# Altium PCB bt-debug-v1.PcbDoc
Units mm, origin at the board's own origin, x right, y up, seen from the top; angles counter-clockwise.
Board outline 64 x 55 mm, 2 copper layers (Top Layer, Bottom Layer), stack 1.571 mm thick; 52 components, 61 nets, 528 pads, 90 vias.
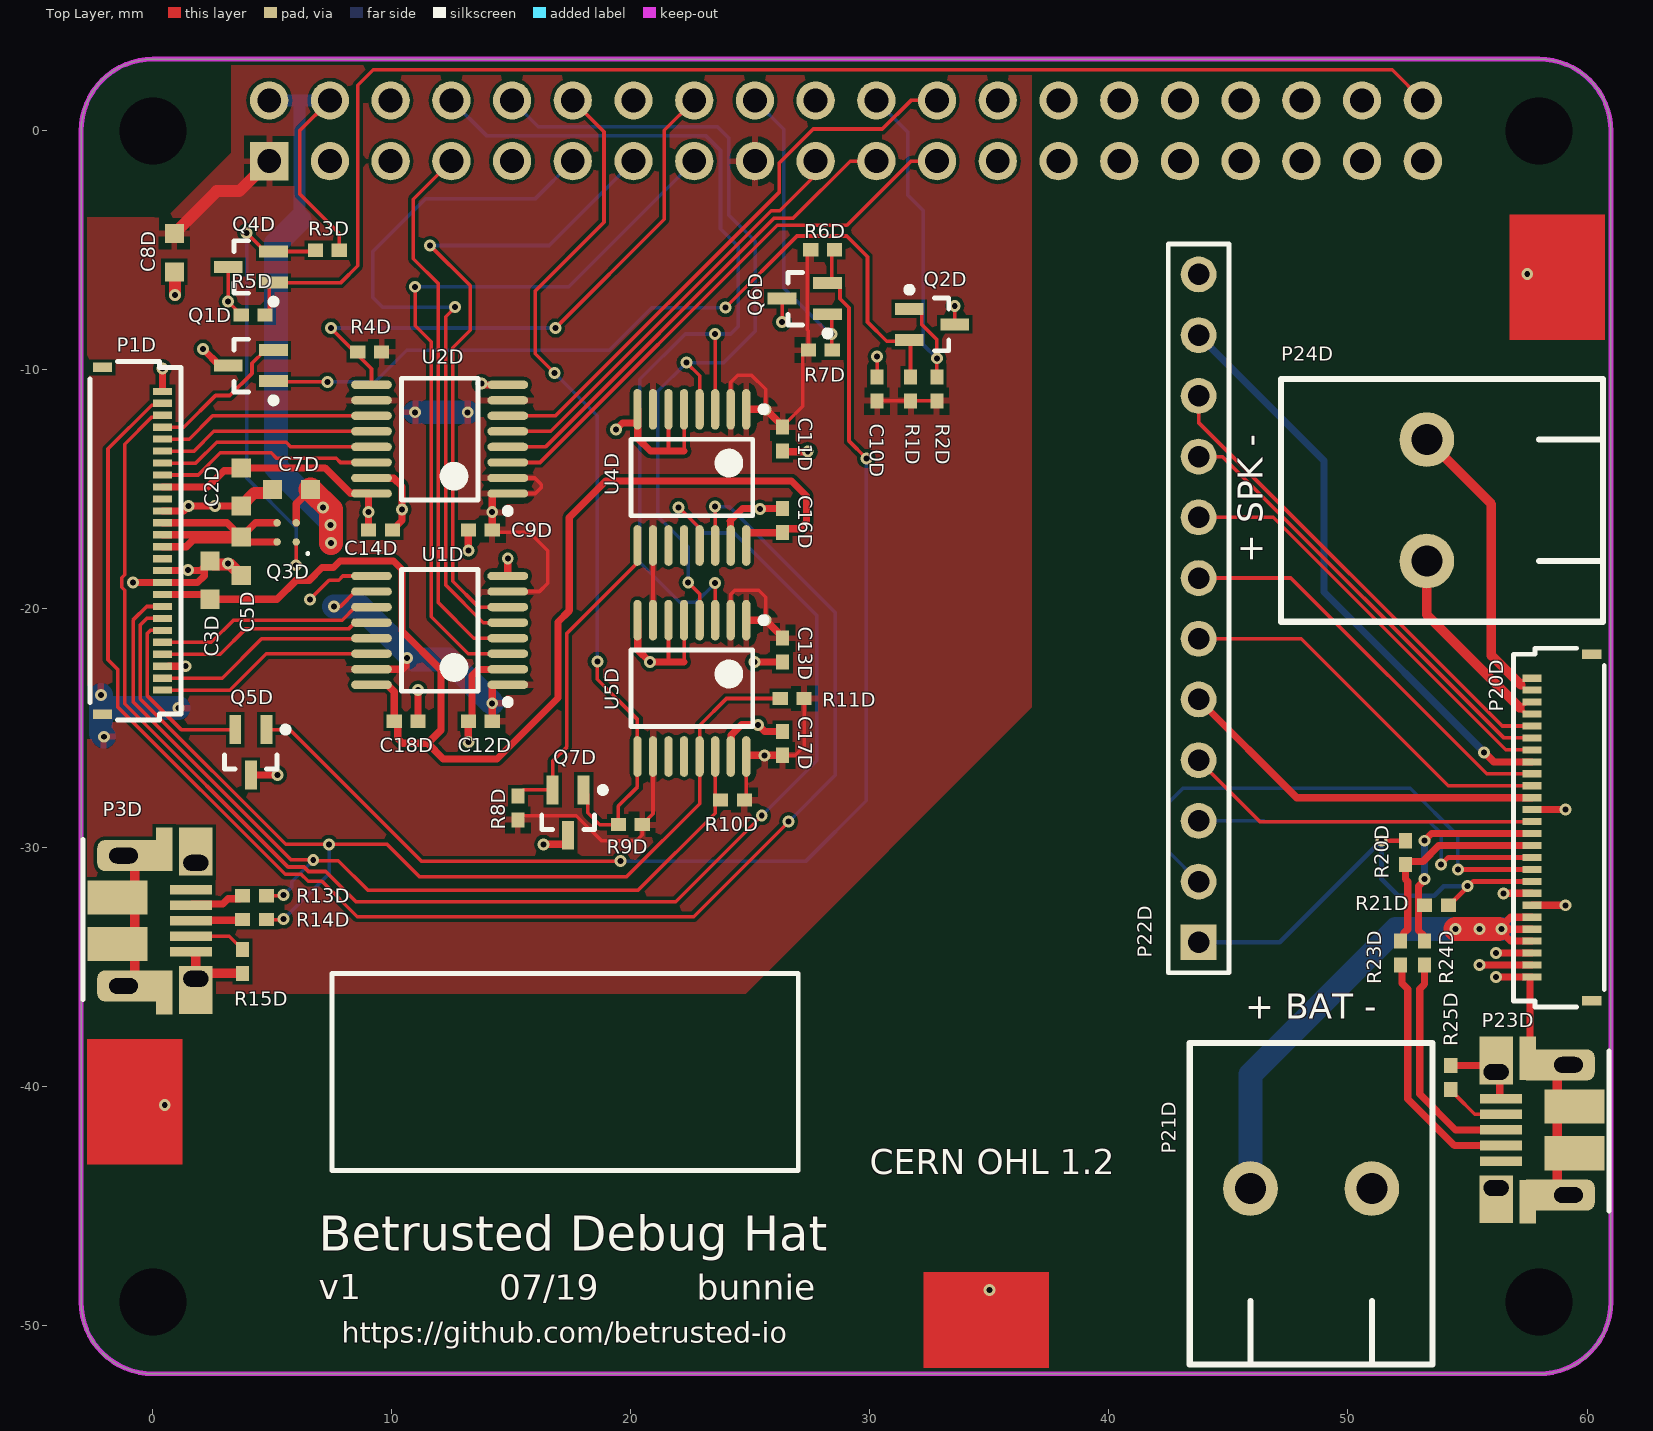
[diagram p0: Top Layer view]
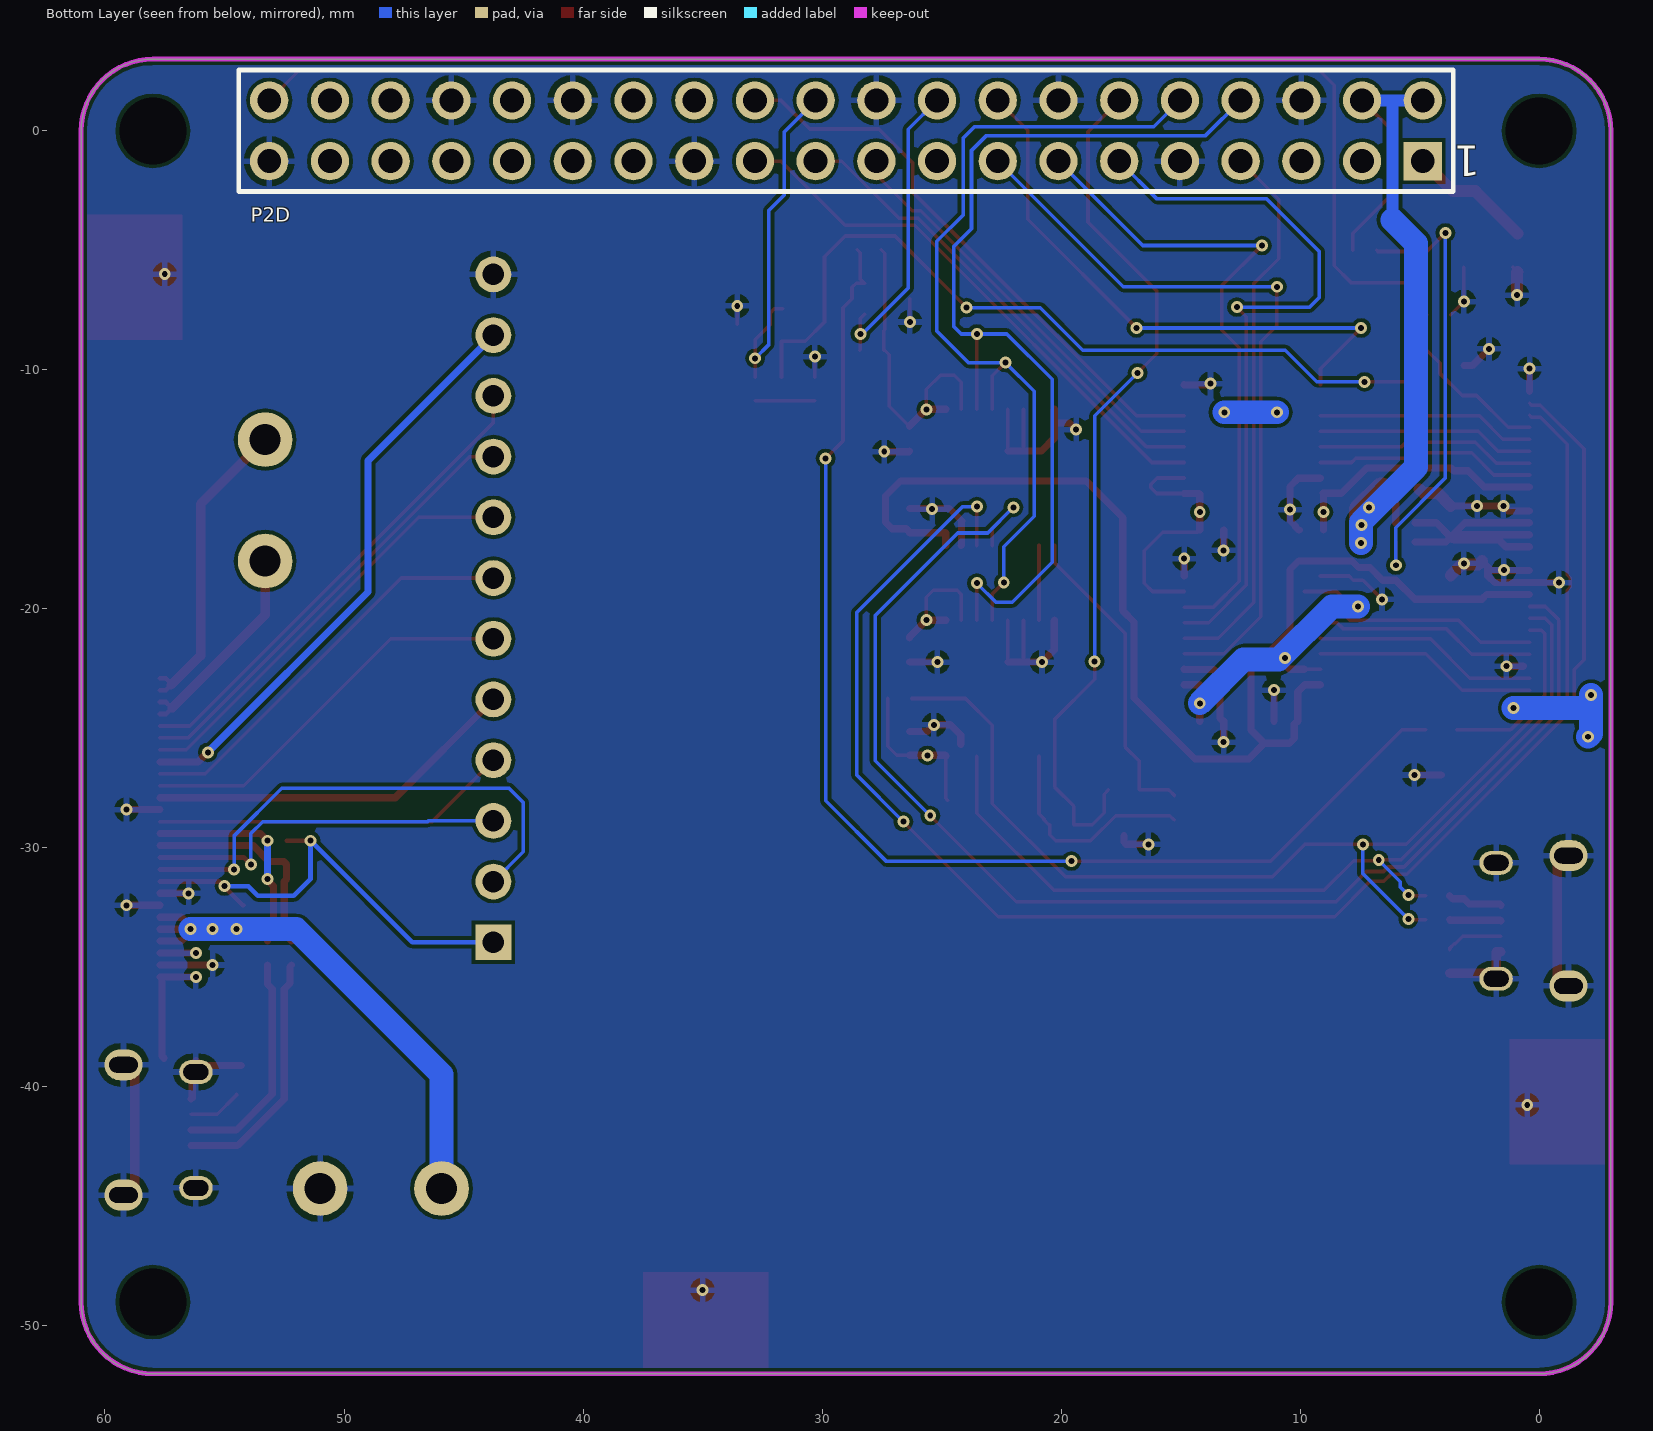
[diagram p1: Bottom Layer view, seen from below]

## Layer stack, top to bottom
Top Solder (Pantone 636U): solder mask 0.0102, Solder Resist, Dk 3.5
Top Layer: signal copper 0.0356
Dielectric 2: prepreg 1.5, FR-4, Dk 4.2
Bottom Layer: signal copper 0.0356
Bottom Solder (Pantone 636U): solder mask 0.0102, Solder Resist, Dk 3.5

## Board outline
-3,-49 -3,0 cw(c0,0) 0,3 58,3 cw(c58,0) 61,0 61,-49 cw(c58,-49) 58,-52 0,-52 cw(c0,-49)

## Design rules (kind name [scope] priority, off if disabled: settings)
Clearance [All] p1: gap=0.15 ignorepadtopadclearanceinfootprint=FALSE
DiffPairsRouting [All] p1: maxlimit=0.127 minlimit=0.127 mostfreqgap=0.127 toplayer_minwidth=0.3 toplayer_maxwidth=0.534 toplayer_prefwidth=0.534 bottomlayer_minwidth=0.3 bottomlayer_maxwidth=0.534 bottomlayer_prefwidth=0.534 impedanceprofiledriven=TRUE impedanceprofileid={78217CE3-51FE-490B-95B5-2C22C78E4475} impedanceprofilevalue=90.000000 maxuncoupledlength=12.7
HoleSize [All] p1: absolutevalues=TRUE maxlimit=4 minlimit=0.025 maxpercent=80.000 minpercent=20.000
MinimumSolderMaskSliver [All] p1 off: minsoldermaskwidth=0.254
PolygonConnect [All] p1: connectstyle=Relief reliefconductorwidth=0.254 reliefentries=4 polygonreliefangle="90 Angle" airgapwidth=0.254
RoomDefinition breakout [InComponentClass('breakout')] p1 off: confinementstyle=ConfineIn formatcopy=TRUE lockcomponents=FALSE outline 62,-50.25 64.5,-50.25 64.5,-16.5 62,-16.5
RoomDefinition debug [InComponentClass('debug')] p2 off: confinementstyle=ConfineIn formatcopy=TRUE lockcomponents=FALSE outline 73.943,-50.777 75.467,-50.777 75.467,-38.331 73.943,-38.331
RoutingVias [All] p1: holewidth=0.25 width=0.5 viastyle="Through Hole" minholewidth=0.25 minwidth=0.5 maxholewidth=0.25 maxwidth=0.5
SilkToSilkClearance [All] p1 off: silktosilkclearance=0.254
SilkToSolderMaskClearance [IsPad] p1 off: minsilkscreentomaskgap=0.254 clearancetoexposedcopper=TRUE
SolderMaskExpansion [All] p1: expansion=0.102
Width [All] p1: maxlimit=3 minlimit=0.15 preferedwidth=0.15
25 further rules are at their usual default settings.

## Classes and differential pairs
component class breakout: P20D P21D P22D P23D P24D R20D R21D R23D R24D R25D
component class debug: C2D C3D C5D C7D C8D C9D C10D C11D C12D C13D C14D C16D C17D C18D NT1D P1D P2D P3D Q1D Q2D Q3D Q4D Q5D Q6D Q7D R1D R2D R3D R4D R5D R6D R7D R8D R9D R10D R11D R13D R14D R15D U1D U2D U4D U5D
differential pair USBD: +USBD_P -USBD_N
differential pair FUSBD: +FUSBD_P -FUSBD_N

## Components (designator, comment, footprint, x,y, rotation, side; value= is the part's Value field where it differs from the comment)
C2D "10uF, 6.3V, X5R" B_CAP0603 3.7,-14.9 r270 top
C3D "10uF, 6.3V, X5R" B_CAP0603 2.4,-18.8 r90 top
C5D "10uF, 6.3V, X5R" B_CAP0603 3.7,-17.8 r270 top
C7D "10uF, 6.3V, X5R" B_CAP0603 5.8,-15 r180 top
C8D "10uF, 6.3V, X5R" B_CAP0603 0.9,-5.1 r270 top
C9D "0.1uF, 10V, X5R" B_CAP0402 13.7,-16.7 r180 top
C10D "0.1uF, 10V, X5R" B_CAP0402 30.3,-10.8 r90 top
C11D "0.1uF, 10V, X5R" B_CAP0402 26.35,-12.9 r270 top
C12D "0.1uF, 10V, X5R" B_CAP0402 13.7,-24.7 r180 top
C13D "0.1uF, 10V, X5R" B_CAP0402 26.35,-21.725 r270 top
C14D "0.1uF, 10V, X5R" B_CAP0402 9.525,-16.7 r0 top
C16D "0.1uF, 10V, X5R" B_CAP0402 26.35,-16.3 r90 top
C17D "0.1uF, 10V, X5R" B_CAP0402 26.35,-25.625 r90 top
C18D "0.1uF, 10V, X5R" B_CAP0402 10.6,-24.7 r0 top
P1D "26-pin FPC" HRS_FH34SRJ-26S-0.5SH(50) 0.4,-17.15 r270 top
P2D "Header 20X2" SAMTEC_SSW-120-01-F-D 4.87,1.27 r0 bottom
P3D "FCI 10103594" USB_MICRO_B_SMT -1.225,-33.05 r270 top
P20D "26-pin FPC" HRS_FH34SRJ-26S-0.5SH(50) 57.7,-29.15 r90 top
P21D "1716060000" weidmuller_1716060000 45.92,-44.25 r0 top
P22D "Header 12" HDR1X12 43.75,-33.95 r90 top
P23D "FCI 10103594" USB_MICRO_B_SMT 59.225,-41.8 r90 top
P24D "1716060000" weidmuller_1716060000 53.3,-18 r90 top
Q1D "DMG1012UW-7" SOT323-3AN 4.1,-9.825 r180 top
Q2D "DMG1012UW-7" SOT323-3AN 32.6,-8.1 r0 top
Q3D "Si8425DB" VISHAY_MICRO_FOOT_4_BUMP 5.6,-16.8 r180 top
Q4D "DMG1012UW-7" SOT323-3AN 4.1,-5.7 r180 top
Q5D "DMG1012UW-7" SOT323-3AN 4.1,-26 r270 top
Q6D "DMG1012UW-7" SOT323-3AN 27.275,-7.025 r180 top
Q7D "DMG1012UW-7" SOT323-3AN 17.375,-28.525 r270 top
R1D "4.7k, 1%" B_RES0402 31.7,-10.8 r270 top
R2D "4.7k, 1%" B_RES0402 32.8,-10.8 r270 top
R3D "4.7k, 1%" B_RES0402 7.3,-5 r180 top
R4D "4.7k, 1%" B_RES0402 9.075,-9.25 r0 top
R5D "4.7k, 1%" B_RES0402 4.2,-7.7 r0 top
R6D "4.7k, 1%" B_RES0402 28.025,-4.975 r180 top
R7D "4.7k, 1%" B_RES0402 27.925,-9.175 r180 top
R8D "4.7k, 1%" B_RES0402 15.275,-28.325 r270 top
R9D "4.7k, 1%" B_RES0402 19.975,-29.025 r0 top
R10D "1.5k, 1%" B_RES0402 24.25,-28 r180 top
R11D "1.5k, 1% (DNP)" B_RES0402 26.75,-23.75 r180 top
R13D "39, 1%" B_RES0402 4.25,-32 r180 top
R14D "39, 1%" B_RES0402 4.25,-33 r180 top
R15D "DNP" B_RES0402 3.75,-34.75 r270 top
R20D "1.5k, 1%" B_RES0402 52.4,-30.2 r270 top
R21D "1.5k, 1% (DNP)" B_RES0402 53.7,-32.4 r180 top
R23D "39, 1%" B_RES0402 52.2,-34.4 r270 top
R24D "39, 1%" B_RES0402 53.2,-34.4 r270 top
R25D "DNP" B_RES0402 54.3,-39.6 r90 top
U1D "74AVC4TD245PW" TSOP65P640-16AN 12,-20.9 r180 top
U2D "74AVC4TD245PW" TSOP65P640-16AN 12,-12.9 r180 top
U4D "74AVC4TD245PW" TSOP65P640-16AN 22.55,-14.5 r270 top
U5D "74AVC4TD245PW" TSOP65P640-16AN 22.55,-23.325 r270 top

## Footprints (in the part's own frame and the unit in brackets; to place one, negate y for a bottom-side part, rotate by r counter-clockwise, add the part's x,y. Pads: shape width x height; smd on the part's side, far side on the other; paste and mask are expansions set on the pad)
B_CAP0402 [mm] "Capacitor 0402"
  rect 0.63x0.55 smd mask+0.07: 1(-0.5,0) 2(0.5,0)
  body extent -0.53,-0.27 0.53,0.28, height 0.4
B_CAP0603 [mm] "Capacitor 0603"
  rect 0.8x0.8 smd mask+0.07: 1(-0.8,0) 2(0.8,0)
  body extent -0.85,-0.45 0.85,0.45, height 0.9
B_RES0402 [mm] "Resistor 0402"
  rect 0.63x0.55 smd mask+0.07: 1(-0.5,0) 2(0.5,0)
  body extent -0.53,-0.27 0.53,0.28, height 0.4
HDR1X12 [mm] "Connector; Header; 12 Position"
  rect 1.5x1.5 hole 0.9: 1(0,0)
  round 1.5 hole 0.9: 2(2.54,0) 3(5.08,0) 4(7.62,0) 5(10.16,0) 6(12.7,0) 7(15.24,0) 8(17.78,0) 9(20.32,0) 10(22.86,0) 11(25.4,0) 12(27.94,0)
  silkscreen extent -1.27,-1.27 29.21,1.27
HRS_FH34SRJ-26S-0.5SH(50) [mm] "Top/bottom entry, back-lock 0.3mm thick FPC, 26 pins"
  rect 0.4x0.8 smd mask+0.07: 0(-7.25,-2.5) 0(7.25,-2.5)
  rect 0.3x0.8 smd mask+0.07: 1(6.25,0) 2(5.75,0) 3(5.25,0) 4(4.75,0) 5(4.25,0) 6(3.75,0) 7(3.25,0) 8(2.75,0) 9(2.25,0) 10(1.75,0) 11(1.25,0) 12(0.75,0) 13(0.25,0) 14(-0.25,0) 15(-0.75,0) 16(-1.25,0) 17(-1.75,0) 18(-2.25,0) 19(-2.75,0) 20(-3.25,0) 21(-3.75,0) 22(-4.25,0) 23(-4.75,0) 24(-5.25,0) 25(-5.75,0) 26(-6.25,0)
  silkscreen extent -7.5,-3.03 7.5,0.77, body extent -7.5,-3.02 7.5,0.78, height 1
SAMTEC_SSW-120-01-F-D [mm] "2x20 2.54mm female header with standard solder tails"
  rect 1.6x1.6 hole 1: 1(0,2.54)
  round 1.6 hole 1: 2(0,0) 3(2.54,2.54) 4(2.54,0) 5(5.08,2.54) 6(5.08,0) 7(7.62,2.54) 8(7.62,0) 9(10.16,2.54) 10(10.16,0) 11(12.7,2.54) 12(12.7,0) 13(15.24,2.54) 14(15.24,0) 15(17.78,2.54) 16(17.78,0) 17(20.32,2.54) 18(20.32,0) 19(22.86,2.54) 20(22.86,0) 21(25.4,2.54) 22(25.4,0) 23(27.94,2.54) 24(27.94,0) 25(30.48,2.54) 26(30.48,0) 27(33.02,2.54) 28(33.02,0) 29(35.56,2.54) 30(35.56,0) 31(38.1,2.54) 32(38.1,0) 33(40.64,2.54) 34(40.64,0) 35(43.18,2.54) 36(43.18,0) 37(45.72,2.54) 38(45.72,0) 39(48.26,2.54) 40(48.26,0)
  silkscreen extent -1.27,-1.27 49.53,3.81, body extent -1.53,-1.2 49.78,3.75, height 8.51
SOT323-3AN [mm] "SOT323, 3-Leads, Body 2.0x1.3mm, Pitch 0.65mm, Lead Span 2.1mm, IPC Medium Density"
  rect 1.2x0.5 smd: 1(-0.95,0.65) 2(-0.95,-0.65) 3(0.95,0)
  silkscreen extent -1.07,-1.1 0.7,1.57, body extent -0.7,-1.1 0.7,1.1, height 1
TSOP65P640-16AN [mm] "TSOP, 16-Leads, Body 5x4.4mm, Pitch 0.65mm, IPC Medium Density"
  oval 1.7x0.35 smd: 1(-2.85,2.275) 2(-2.85,1.625) 3(-2.85,0.975) 4(-2.85,0.325) 5(-2.85,-0.325) 6(-2.85,-0.975) 7(-2.85,-1.625) 8(-2.85,-2.275) 9(2.85,-2.275) 10(2.85,-1.625) 11(2.85,-0.975) 12(2.85,-0.325) 13(2.85,0.325) 14(2.85,0.975) 15(2.85,1.625) 16(2.85,2.275)
  silkscreen extent -2.98,-2.55 1.6,3.12, body extent -2.25,-2.55 2.25,2.55, height 1.1
USB_MICRO_B_SMT [mm] "Micro B SMT footprint (based on USB-IF recommended pattern)"
  rect 1.825x0.7 smd mask+0.07: 0(-3,1.7) 0(3,1.7)
  rect 2x1.4 smd mask+0.07: 0(-2.9,3.03) 0(2.9,3.03)
  oval 1.3x1.6 hole 0.66 slot 1.2 at 90 deg mask+0.07: 0(-2.725,0) 0(2.725,0)
  rrect50% 1.3x3.15 smd mask+0.07: 0(-2.725,0.475) 0(2.725,0.475)
  oval 1x1.4 hole 0.66 slot 1.05 at 90 deg mask+0.07: 0(-2.425,3.03) 0(2.425,3.03)
  rect 1.425x2.5 smd mask+0.07: 0(-0.975,-0.25) 0(0.975,-0.25)
  rect 0.4x1.75 smd mask+0.07: 1(-1.3,2.825) 2(-0.65,2.825) 3(0,2.825) 4(0.65,2.825) 5(1.3,2.825)
  silkscreen extent -3.4,-1.7 3.3,-1.7, body extent -4.02,-2.75 4.02,3.28, height 2.85
VISHAY_MICRO_FOOT_4_BUMP [mm] "BGA, 4-Leads, Body 1.56x1.56mmx0.60mm, Pitch 0.80mm"
  round 0.31 smd mask+0.07: 1(-0.4,0.4) 2(0.4,0.4) 3(0.4,-0.4) 4(-0.4,-0.4)
  silkscreen extent -0.93,0.84 -0.84,0.93, body extent -0.78,-0.78 0.78,0.78, height 0.6
weidmuller_1716060000 [mil]
  round 90 hole 51.18: 1(0,0) 2(200,0)
  silkscreen extent -100,-290 300,240

## Part data
C2D C3D C5D C7D C8D: library part "Cap Semi", "Capacitor (Semiconductor SIM Model)", MPN=CL10A106MQ8NNNC, MYPN=C-106-6.3-X5R-0603, VENDOR=Samsung
C9D C10D C11D C12D C13D C14D C16D C17D C18D: library part "Cap Semi", "Capacitor (Semiconductor SIM Model)", MPN=CL05A104KP5NNNC, MYPN=C-104-10-X5R-0402, VENDOR=Samsung
P1D P20D: library part FPC-26, "26 Pin FPC header", MPN=FH34SRJ-26S-0.5SH(99), MYPN=J-FPC-0.5mm-26-0.3mm-T/B, VENDOR=Hirose
  P20D: System=Connector
P2D: "Header, 20-Pin, Dual row", LatestRevisionDate=17-Jul-2002, LatestRevisionNote="Re-released for DXP Platform.", Publisher="Altium Limited"
P3D P23D: library part USB_MINI-AB_1, "Micro USB B type connector", MPN=10103594-0001LF, MYPN=J-MICROUSB-SMT-FCI, VENDOR=FCI
P21D P24D: library part "Header 2", "Header, 2-Pin", LatestRevisionDate=17-Jul-2002, LatestRevisionNote="Re-released for DXP Platform.", MPN=1716060000, MYPN=J-TB-2P-5.08, Publisher="Altium Limited", VENDOR=Weidmuller
P22D: "Header, 12-Pin", LatestRevisionDate=17-Jul-2002, LatestRevisionNote="Re-released for DXP Platform.", Publisher="Altium Limited"
Q1D Q2D Q4D Q5D Q6D Q7D: library part MOSFET-N, "N-Channel MOSFET", LatestRevisionDate=17-Jul-2002, LatestRevisionNote="Re-released for DXP Platform.", MPN=DMG1012UW-7, MYPN=Q-DMG1012UW-7, PackageReference=E3, PackageVersion=1995/1996, Published=8-Jun-2000, Publisher="Altium Limited", VENDOR="Diodes Inc"
Q3D: "P-channel 20V 6.2A 27mOhm @ -2.5V", MPN=SI8457DB-T1-E1, MYPN=Q-Si8457, VENDOR="Vishay Siliconix"
R1D R2D R3D R4D R5D R6D R7D R8D R9D R13D R14D R15D R23D R24D R25D: library part Res1, "Resistor", MPN=ANY, VENDOR=ANY
  R1D R2D R3D R4D R5D R6D R7D R8D R9D: MYPN=R-472-1P-1_16W-0402
  R13D R14D R23D R24D: MYPN=R-390-1P-1_16W-0402
  R15D R25D: MYPN=DNP
R10D R20D: library part Res1, "Resistor", MPN=RS02U152FT, MYPN=R-152-1P-1_16W-0402, VENDOR=Fenghua
R11D R21D: library part Res1, "Resistor", MPN=DNP, MYPN=DNP, VENDOR=Fenghua
U1D U2D U4D U5D: library part 74AVC4TD245, "4-bit dual supply translating transceiver with configurable voltage translation; 3-state", MPN=74AVC4TD245PW, MYPN=U-74AVC4TD245PW, VENDOR=Nexperia

## Free pads (board coordinates)
  round 2.7 hole 2.8 unplated mask+1.2: 0(0,-49) 0(0,0) 0(58,-49) 0(58,0)
  rect 2.54x0.051 on Top Overlay: 1(32.739,-39.24) 1(32.739,-39.189) 1(32.739,-39.139) 1(32.739,-39.088) 1(32.739,-39.037) 1(32.739,-38.986) 1(32.739,-38.935) 1(32.739,-38.885) 1(32.739,-38.834) 1(32.739,-38.783) 1(32.739,-38.732) 1(32.739,-38.681) 1(32.841,-38.478) 1(37.159,-38.478) 1(37.261,-39.24) 1(37.261,-38.834) 1(37.261,-38.681) 1(37.261,-39.291) 1(37.261,-39.189) 1(37.261,-39.139) 1(37.261,-39.088) 1(37.261,-38.885) 1(37.261,-38.783) 1(37.261,-38.732)
  rect 2.591x0.051 on Top Overlay: 1(32.765,-39.393) 1(32.765,-38.631) 1(32.765,-39.342) 1(32.765,-39.291) 1(32.765,-38.58) 1(32.816,-39.443) 1(37.184,-39.443) 1(37.235,-39.393) 1(37.235,-39.342) 1(37.235,-38.631) 1(37.235,-38.58) 1(37.235,-38.529)
  rect 2.642x0.051 on Top Overlay: 1(32.79,-38.529)
  rect 0.102x0.051 on Top Overlay: 1(32.841,-36.192) 1(33.908,-41.425) 1(36.092,-41.425) 1(37.159,-36.192)
  rect 0.152x0.051 on Top Overlay: 1(32.866,-41.729) 1(37.134,-41.729)
  rect 0.254x0.051 on Top Overlay: 1(32.866,-41.679) 1(32.866,-36.243) 1(33.882,-41.374) 1(36.118,-41.374) 1(37.134,-41.679) 1(37.134,-36.243)
  rect 0.356x0.051 on Top Overlay: 1(32.866,-36.294) 1(33.832,-41.323) 1(36.168,-41.323) 1(37.134,-36.294) 1(37.134,-41.628)
  rect 0.406x0.051 on Top Overlay: 1(32.892,-41.628)
  rect 0.508x0.051 on Top Overlay: 1(32.892,-41.577) 1(32.892,-36.345) 1(37.108,-41.577)
  rect 0.61x0.051 on Top Overlay: 1(32.892,-36.395) 1(37.108,-41.526) 1(37.108,-36.395)
  rect 0.66x0.051 on Top Overlay: 1(32.917,-41.526)
  rect 0.762x0.051 on Top Overlay: 1(32.917,-41.475) 1(32.917,-36.446) 1(37.083,-41.475)
  rect 0.864x0.051 on Top Overlay: 1(32.917,-41.425) 1(32.917,-36.497) 1(35,-35.43) 1(37.083,-41.425) 1(37.083,-36.497)
  rect 0.965x0.051 on Top Overlay: 1(32.917,-36.548) 1(35,-35.481) 1(35,-35.583) 1(35,-35.532) 1(37.083,-36.548)
  rect 1.118x0.051 on Top Overlay: 1(32.943,-41.323) 1(32.943,-36.599) 1(35.025,-35.938) 1(37.057,-41.323) 1(37.057,-36.599)
  rect 1.219x0.051 on Top Overlay: 1(32.943,-36.649) 1(35.025,-36.192) 1(37.057,-36.649)
  rect 1.016x0.051 on Top Overlay: 1(32.943,-41.374) 1(35.025,-35.633) 1(37.057,-41.374)
  rect 2.337x0.051 on Top Overlay: 1(32.943,-39.494) 1(36.295,-37.97) 1(37.057,-39.494)
  rect 2.286x0.051 on Top Overlay: 1(33.019,-38.427) 1(33.73,-37.97) 1(37.032,-38.427)
  rect 2.134x0.051 on Top Overlay: 1(33.095,-39.545) 1(33.603,-38.021) 1(36.397,-38.021) 1(36.905,-39.545)
  rect 1.93x0.051 on Top Overlay: 1(33.146,-41.12) 1(33.4,-39.748) 1(33.451,-39.799) 1(33.451,-38.123) 1(33.552,-40.104) 1(33.552,-40.053) 1(36.448,-40.104) 1(36.448,-40.053) 1(36.549,-39.799) 1(36.549,-38.123) 1(36.854,-41.12)
  rect 1.829x0.051 on Top Overlay: 1(33.146,-41.171) 1(33.247,-40.917) 1(33.298,-40.866) 1(33.298,-40.815) 1(33.298,-38.326) 1(33.349,-40.764) 1(33.349,-39.697) 1(33.349,-39.647) 1(33.349,-38.275) 1(33.4,-38.224) 1(33.552,-40.256) 1(33.552,-40.205) 1(36.448,-40.256) 1(36.448,-40.205) 1(36.651,-39.697) 1(36.651,-38.275) 1(36.702,-40.815) 1(36.702,-39.647) 1(36.702,-38.326) 1(36.753,-40.917) 1(36.854,-41.171)
  rect 2.032x0.051 on Top Overlay: 1(33.146,-38.377) 1(33.552,-40.002) 1(33.552,-39.951) 1(33.552,-39.901) 1(36.448,-40.002) 1(36.448,-39.951) 1(36.499,-39.901) 1(36.854,-38.377)
  rect 1.778x0.051 on Top Overlay: 1(33.171,-41.221) 1(33.374,-40.713) 1(33.374,-40.663) 1(33.425,-40.612) 1(33.476,-40.51) 1(36.524,-40.51) 1(36.575,-40.612) 1(36.626,-40.713) 1(36.626,-40.663) 1(36.676,-40.764) 1(36.829,-41.221)
  rect 1.88x0.051 on Top Overlay: 1(33.171,-41.069) 1(33.222,-41.018) 1(33.222,-40.967) 1(33.273,-39.596) 1(33.425,-38.173) 1(33.578,-40.155) 1(36.473,-40.155) 1(36.575,-38.173) 1(36.626,-39.748) 1(36.626,-38.224) 1(36.727,-39.596) 1(36.727,-40.866) 1(36.778,-40.967) 1(36.829,-41.069) 1(36.829,-41.018)
  rect 1.727x0.051 on Top Overlay: 1(33.197,-41.272) 1(33.451,-40.561) 1(33.501,-40.459) 1(33.552,-40.409) 1(33.552,-40.358) 1(33.552,-40.307) 1(35.025,-36.497) 1(36.448,-40.358) 1(36.448,-40.307) 1(36.499,-40.459) 1(36.549,-40.561)
  rect 1.981x0.051 on Top Overlay: 1(33.476,-39.85) 1(33.527,-38.072) 1(35,-36.548) 1(36.473,-38.072) 1(36.524,-39.85)
  rect 4.724x0.051 on Top Overlay: 1(35,-37.767) 1(35,-37.818) 1(35,-37.462)
  rect 4.623x0.051 on Top Overlay: 1(35,-37.716) 1(35,-37.665) 1(35,-37.615) 1(35,-37.564)
  rect 4.928x0.051 on Top Overlay: 1(35,-37.31)
  rect 5.334x0.051 on Top Overlay: 1(35,-37.005) 1(35,-37.056)
  rect 5.436x0.051 on Top Overlay: 1(35,-36.954) 1(35,-36.7)
  rect 2.184x0.051 on Top Overlay: 1(35,-36.599)
  rect 1.27x0.051 on Top Overlay: 1(35,-36.243) 1(35,-36.395) 1(35,-36.345) 1(35,-36.294)
  rect 1.067x0.051 on Top Overlay: 1(35,-35.887) 1(35,-35.837) 1(35,-35.786) 1(35,-35.735) 1(35,-35.684)
  rect 4.826x0.051 on Top Overlay: 1(35,-37.919) 1(35,-37.869) 1(35,-37.411)
  rect 5.029x0.051 on Top Overlay: 1(35,-37.259)
  rect 5.131x0.051 on Top Overlay: 1(35,-37.157)
  rect 5.232x0.051 on Top Overlay: 1(35,-37.107)
  rect 5.537x0.051 on Top Overlay: 1(35,-36.903) 1(35,-36.853) 1(35,-36.751)
  rect 5.639x0.051 on Top Overlay: 1(35,-36.802)
  rect 2.489x0.051 on Top Overlay: 1(35,-36.649) 1(37.286,-39.037) 1(37.286,-38.986) 1(37.286,-38.935)
  rect 1.473x0.051 on Top Overlay: 1(35,-36.446)
  rect 1.168x0.051 on Top Overlay: 1(35,-36.141) 1(35,-36.091) 1(35,-36.04) 1(35,-35.989)
  rect 4.877x0.051 on Top Overlay: 1(35.025,-37.361)
  rect 4.674x0.051 on Top Overlay: 1(35.025,-37.513)
  rect 5.08x0.051 on Top Overlay: 1(35.025,-37.208)
  rect 1.676x0.051 on Top Overlay: 1(36.473,-40.409) 1(36.829,-41.272)
  rect 0.711x0.051 on Top Overlay: 1(37.108,-36.446)
  rect 0.457x0.051 on Top Overlay: 1(37.134,-36.345)

## Via types
v1: diameter 0.5, hole 0.25, Top Layer to Bottom Layer, tented both sides, 90 vias

## Nets (pads, with @x,y where several pads share a name; then routed paths per layer and width w, separated by ;. In a path a pad name is that pad's centre, name@x,y a point inside that pad or via, vN(x,y) a via of type N, cw(c..) or ccw(c..) an arc to the next point about the centre after c; other vN are vias at no path point)
CRESET_3V: Q1D.1 Q2D.2 R1D.1 | length 34.1
  Top Layer w0.15: Q1D.1 5.075,-10.5 v1(7.3,-10.5) ; v1(23.95,-7.4) 26.95,-4.4 29.025,-4.4 29.9,-5.275 29.9,-8 30.7,-8.8 31.7,-8.8 R1D.1
  Bottom Layer w0.15: v1(7.3,-10.5) 9.3,-10.5 10.625,-9.175 19.1,-9.175 20.875,-7.4 v1(23.95,-7.4)
CRESET_B: P1D.23 Q1D.2 | length 6.2
  Top Layer w0.15: P1D.23 1.3,-12.4 2.625,-11.075 3.225,-11.075 4.15,-10.15 4.15,-9.725 4.7,-9.175 Q1D.2
CRESET_N_3V: P2D.22 Q2D.1 R2D.1 | length 15.4
  Top Layer w0.15: Q2D.1 32,-7.45 32.175,-7.625 32.175,-8.107 32.8,-8.732 v1(32.8,-9.516) R2D.1
  Bottom Layer w0.15: P2D.22 31.575,-0.035 31.575,-2.675 32.225,-3.325 32.225,-8.941 v1(32.8,-9.516)
DRV_UP5K_N: P2D.16 R4D.1 U2D.9 | length 24.4
  Top Layer w0.15: v1(7.45,-8.25) 9.15,-9.95 U2D.9 ; v1(16.85,-8.25) 21.4,-3.7 21.4,0.02 P2D.16
  Bottom Layer w0.15: v1(7.45,-8.25) v1(16.85,-8.25)
F_UART_RX: P1D.25 U4D.14 | length 65.4
  Top Layer w0.15: P1D.25 0.325,-11.475 -0.043,-11.475 -1.875,-13.307 -1.875,-22.125 -1.475,-22.525 -1.475,-24.09 5.535,-31.1 6.2,-31.1 6.5,-31.4 7.075,-31.4 8.55,-32.875 22.625,-32.875 v1(26.6,-28.9) ; U4D.14 v1(23.525,-15.725)
  Bottom Layer w0.15: v1(23.525,-15.725) 24.125,-15.725 28.55,-20.15 28.55,-26.95 v1(26.6,-28.9)
F_UART_TX: P1D.24 U4D.13 | length 63.5
  Top Layer w0.15: P1D.24 0.325,-11.975 -0.043,-11.975 -1.175,-13.107 -1.175,-18.578 -1.3,-18.703 -1.3,-19.097 -1.175,-19.222 -1.175,-23.966 5.659,-30.8 6.324,-30.8 6.512,-30.988 7.238,-30.988 8.5,-32.25 21.875,-32.25 v1(25.475,-28.65) ; v1(22,-15.75) 22.875,-16.625 U4D.13
  Bottom Layer w0.15: v1(22,-15.75) 23.075,-16.825 24.325,-16.825 27.775,-20.275 27.775,-26.35 v1(25.475,-28.65)
FUSBD_N: P3D.2 R13D.2 | length 2.3
  Top Layer w0.3: P3D.2 1.65,-32.35 2.925,-32.35 3.15,-32.125 3.625,-32.125 R13D.2
FUSBD_P: P3D.3 R14D.2 | length 2.2
  Top Layer w0.3: P3D.3 1.625,-33.025 3.725,-33.025 R14D.2 R14D.2@3.71,-33
GND: C2D.2 C3D.2 C5D.2 C7D.2 C8D.2 C9D.2 C10D.2 C11D.2 C12D.2 C13D.2 C14D.2 C16D.2 C17D.2 C18D.2 P1D.3 P1D.10 P1D.11 P1D.16 P1D.26 P2D.6 P2D.9 P2D.14 P2D.20 P2D.25 P2D.30 P2D.34 P2D.39 P3D.0 P3D.5 P20D.12 P20D.19 P20D.20 P20D.24 P20D.25 P20D.26 P21D.2 P22D.12 P23D.0 P23D.5 Q1D.3 Q2D.3 Q4D.3 Q5D.3 Q6D.3 Q7D.3 R5D.1 R15D.2 R25D.2 U1D.2 U1D.8 U1D.9 U2D.8 U2D.15 U4D.5 U4D.6 U4D.8 U4D.15 U5D.5 U5D.6 U5D.8 U5D.15 | length 93.5
  Top Layer w0.15: C8D.2 C8D.2@1.1,-5.7 ; Q4D.3 v1(3.15,-7.15) R5D.1 ; v1(6.575,-19.6) 7.375,-18.8 7.775,-18.8 7.95,-18.625 U1D.9 ; 21.512,-22.225 21.575,-22.162 U5D.6 ; 21.575,-13.4 U4D.6 ; 22.225,-22.225 U5D.5 ; 22.225,-13.4 U4D.5 ; v1@26.3,-8.025 v1(26.325,-8) Q6D.3 ; C10D.2 v1(30.3,-9.45) ; Q2D.3 v1(33.55,-7.325)
  Top Layer w0.3: v1(-0.825,-18.9) P1D.10 1.875,-18.9 2.15,-18.625 C3D.2@2.15,-18.25 ; P1D.11 2,-18.4 C3D.2@2.15,-18.25 ; P1D.16 1.3,-15.9 v1(1.5,-15.7) v1(2.6,-15.7) C2D.2 ; P1D.26 v1(0.4,-9.95) ; P1D.3@0.65,-22.4 v1(1.375,-22.4) ; v1(2.1,-9.125) 2.8,-9.825 Q1D.3 ; C3D.2 C3D.2@2.15,-18.25 ; Q5D.3 v1(5.225,-26.95) v1@5.25,-26.975 ; U2D.15 9.16,-14.535 10.085,-14.535 10.425,-14.875 v1(10.425,-15.85) 10.425,-16.3 10.19,-16.535 10.19,-16.575 10.065,-16.7 C14D.2 ; C18D.2 v1(11.1,-23.4) ; v1@13.175,-25.6 v1(13.2,-25.575) C12D.2 13.225,-24.7 13.35,-24.575 13.35,-22.8 13.615,-22.535 14.84,-22.535 U1D.2 ; v1(13.2,-17.55) C9D.2 ; v1(13.75,-10.58) 13.805,-10.635 14.84,-10.635 U2D.8 ; U1D.8 v1(14.85,-17.9) ; v1(16.35,-29.85) 17.275,-29.85 17.375,-29.75 Q7D.3 ; v1(19.375,-12.5) 19.65,-12.225 20.252,-12.225 20.275,-12.202 U4D.8 20.285,-11.66 20.285,-12.86 20.825,-13.4 21.575,-13.4 22.225,-13.4 ; U5D.8 20.285,-20.485 20.285,-21.71 v1(20.8,-22.225) 21.512,-22.225 22.225,-22.225 ; U4D.15 24.165,-17.34 24.165,-16.34 24.15,-16.325 24.675,-15.8 C16D.2 ; U5D.15@24.2,-25.675 24.2,-25.275 24.625,-24.85 v1(25.325,-24.85) 25.6,-25.125 C17D.2 ; v1(25.175,-22.225) C13D.2 ; C11D.2 26.375,-13.425 v1(27.4,-13.425) ; R25D.2 55.995,-39.1 56.195,-38.9 56.35,-39.055 56.35,-40.45 P23D.5 ; v1(55.5,-34.9) P20D.25 ; v1(56.2,-35.4) P20D.26@57.613,-35.4 ; v1(56.2,-34.4) P20D.24 ; v1(56.5,-31.9) P20D.19 ; P23D.0@57.525,-38.8 57.613,-38.713 P20D.26@57.613,-35.4 ; P20D.26 P20D.26@57.613,-35.4 ; P20D.20 v1(59.1,-32.4) ; P20D.12 v1(59.1,-28.4)
  Top Layer w0.4: P3D.0@-0.75,-35.5 P3D.0@-0.75,-30.05 ; P3D.5 1.805,-34.35 1.805,-35.675 2.23,-35.25 R15D.2 ; P23D.0@58.75,-44.525 P23D.0@58.75,-39.075
  Top Layer w0.5: C8D.2 0.925,-5.925 v1(0.925,-6.875) ; C3D.2 2.55,-18.15 3.25,-18.15 C5D.2 ; C2D.2 4.25,-15.15 4.85,-15.15 C7D.2
  other v1: 35,-48.5 0.5,-40.75 1.475,-18.375 3.15,-18.1 25.4,-15.825 57.5,-6
GPIO0: P20D.17 P22D.2 | length 21.5
  Top Layer w0.2: v1(54.6,-30.9) P20D.17
  Bottom Layer w0.15: P22D.2 42.5,-30.16 42.5,-28.1 43.1,-27.5 52.6,-27.5 54.6,-29.5 v1(54.6,-30.9)
GPIO1: P20D.16 P22D.3 | length 15.6
  Top Layer w0.2: v1(53.9,-30.7) 54.2,-30.4 P20D.16
  Bottom Layer w0.15: P22D.3 46.47,-28.87 46.5,-28.9 53.4,-28.9 53.9,-29.4 v1(53.9,-30.7)
GPIO2: P20D.15 R20D.2 R23D.1 | length 9
  Top Layer w0.3: R23D.1 52.325,-33.775 52.325,-33.575 52.5,-33.4 52.5,-31.4 52.4,-31.3 R20D.2 52.525,-30.575 53.125,-30.575 53.8,-29.9 P20D.15
GPIO3: P20D.14 R21D.2 R24D.1 | length 9
  Top Layer w0.3: R24D.1 53.2,-33.7 52.95,-33.45 52.95,-31.604 53.2,-31.354 v1(53.2,-31.3) ; v1(53.2,-29.7) 53.5,-29.4 P20D.14
  Bottom Layer w0.3: v1(53.2,-31.3) v1(53.2,-29.7)
GPIO4: P20D.13 P22D.4 | length 15
  Top Layer w0.15: P22D.4 46.32,-28.9 P20D.13
I2C0_SCL: P20D.9 P22D.7 | length 17.3
  Top Layer w0.15: P22D.7 47.61,-18.71 55.8,-26.9 P20D.9
I2C0_SDA: P20D.10 P22D.6 | length 16.5
  Top Layer w0.15: P22D.6 48.05,-21.25 54.2,-27.4 P20D.10
JTAG_TCK: P1D.2 U1D.13 | length 9.4
  Top Layer w0.15: P1D.2 2.9,-22.9 4.55,-21.25 9.125,-21.25 U1D.13
JTAG_TCK_3V: P2D.7 U1D.4 | length 23.2
  Top Layer w0.15: P2D.7@12.55,-1.33 P2D.7 10.9,-2.86 10.9,-5.35 11.95,-6.4 11.95,-19.75 13.425,-21.225 U1D.4
JTAG_TDI: P1D.5 U1D.11 | length 9.4
  Top Layer w0.15: P1D.5 2.45,-21.4 3.375,-20.475 7.925,-20.475 8.475,-19.925 U1D.11
JTAG_TDI_3V: P2D.13 U1D.6 | length 27.8
  Top Layer w0.15: v1(11.6,-4.8) 13.275,-6.475 13.275,-8.35 12.55,-9.075 12.55,-18.85 13.625,-19.925 U1D.6
  Bottom Layer w0.15: v1(11.6,-4.8) 16.58,-4.8 P2D.13
JTAG_TDO: P1D.1 U1D.14 | length 9.4
  Top Layer w0.15: P1D.1 3.225,-23.4 4.75,-21.875 U1D.14
JTAG_TDO_3V: P2D.15 U1D.3 | length 31.8
  Top Layer w0.15: v1(10.975,-6.525) 10.975,-8.15 11.65,-8.825 11.65,-20.325 13.2,-21.875 U1D.3
  Bottom Layer w0.15: v1(10.975,-6.525) 17.395,-6.525 P2D.15
JTAG_TMS: P1D.4 U1D.12 | length 9.3
  Top Layer w0.15: P1D.4 2.825,-21.9 3.9,-20.825 8.209,-20.825 8.459,-20.575 U1D.12
JTAG_TMS_3V: P2D.11 U1D.5 | length 30.5
  Top Layer w0.15: v1(12.65,-7.375) 12.25,-7.775 12.25,-19.004 13.821,-20.575 U1D.5
  Bottom Layer w0.15: v1(12.65,-7.375) 9.6,-7.375 9.2,-6.975 9.2,-5.05 11.4,-2.85 15.99,-2.85 P2D.11
NetP3D_4: P3D.4 R15D.1 | length 2.4
  Top Layer w0.15: P3D.4 3.2,-33.7 3.51,-34.01 3.55,-34.01 3.75,-34.21 R15D.1
NetP23D_4: P23D.4 R25D.1 | length 2.3
  Top Layer w0.15: R25D.1@54.5,-40.3 54.5,-40.34 55.3,-41.14 56.39,-41.14 P23D.4
NetQ3D_1: Q3D.1 Q4D.2 R3D.2 | length 19
  Top Layer w0.15: v1@3.9,-4.275 v1(3.925,-4.275) 4.7,-5.05 Q4D.2 6.75,-5.05 R3D.2 ; v1(6,-18.175) Q3D.1
  Bottom Layer w0.15: v1(3.925,-4.275) 3.925,-14.525 6,-16.6 v1(6,-18.175)
NetQ7D_2: Q7D.2 R8D.1 U4D.9 | length 13.3
  Top Layer w0.15: R8D.1 15.275,-27.785 15.475,-27.585 15.515,-27.585 15.525,-27.575 Q7D.2 16.725,-26.375 17.325,-25.775 17.325,-21.025 20.275,-18.075 U4D.9
P1.8V: C2D.1 C14D.1 P1D.18 U2D.16 | length 11
  Top Layer w0.3: P1D.18 2.3,-14.9 2.975,-14.225 3.575,-14.225 C2D.1 7.2,-14.1 8.265,-15.165 9.039,-15.165 9.048,-15.175 9.025,-15.198 v1(9.025,-15.949) C14D.1
P1.8V_T: C3D.1 C16D.1 C18D.1 P1D.9 U1D.16 U4D.16 | length 53.2
  Top Layer w0.3: P1D.9 2.2,-19.4 C3D.1 5.2,-19.6 6,-18.8 6.55,-18.8 7.075,-18.275 7.556,-18.275 7.831,-18 10.075,-18 10.425,-18.35 10.425,-20.925 12.05,-22.55 12.05,-25.075 11.5,-25.625 ; U1D.16 9.811,-23.175 10.1,-23.464 C18D.1 10.125,-24.7 10.25,-24.825 10.25,-25.425 10.45,-25.625 11.5,-25.625 ; U4D.16 24.825,-16.836 24.848,-16.812 26.338,-16.812 C16D.1 26.35,-16.775 26.475,-16.65 27.075,-16.65 27.35,-16.375 27.35,-15.275 26.725,-14.65 18.95,-14.65 17.425,-16.175 17.425,-20.075 16.95,-20.55 16.95,-23.725 14.4,-26.275 12.15,-26.275 11.5,-25.625
P1.8VB: P20D.11 P22D.5 | length 15.7
  Top Layer w0.3: P22D.5 47.86,-27.9 P20D.11
P3.3V: C8D.1 C9D.1 C10D.1 C11D.1 C12D.1 C13D.1 C17D.1 P2D.1 P2D.17 R1D.2 R2D.2 R4D.2 R6D.2 R7D.2 R8D.2 R9D.2 R10D.1 R11D.1 U1D.1 U1D.7 U1D.10 U1D.15 U2D.1 U2D.2 U2D.7 U2D.10 U4D.1 U4D.2 U4D.7 U4D.10 U5D.1 U5D.2 U5D.7 U5D.10 U5D.16 | length 79.1
  Top Layer w0.15: v1(7.575,-19.9) 7.85,-19.9 8.475,-19.275 U1D.10 U1D.10@9.825,-19.275 ; U1D.15 U1D.15@9.825,-22.525 ; v1@14.133,-23.882 v1(14.2,-23.949) ; C9D.1 14.3,-16.8 15.75,-16.8 16.525,-17.575 16.525,-18.925 16.175,-19.275 U1D.7 ; U2D.1 16,-15.175 16.25,-14.925 16.25,-14.8 15.975,-14.525 U2D.2 ; R8D.2 15.45,-28.65 17.718,-28.65 18.768,-29.7 20.225,-29.7 20.475,-29.45 R9D.2 20.515,-29.025 20.715,-28.825 20.715,-28.785 20.925,-28.575 U5D.10 ; U5D.7 U4D.10 ; U5D.2 24.175,-19.4 24.35,-19.225 25.35,-19.225 25.64,-19.515 v1(25.64,-20.475) ; U4D.2 24.175,-10.525 24.475,-10.225 25.05,-10.225 25.64,-10.815 v1(25.64,-11.65) ; R10D.1 24.825,-27.925 U5D.16 ; C17D.1 26.875,-26.125 27.25,-25.75 R11D.1 ; C11D.1 26.35,-12.36 27.185,-11.525 27.185,-9.375 27.385,-9.175 R7D.2 27.425,-8.375 27.375,-8.325 27.375,-5.125 R6D.2 ; C10D.1 R1D.2 R2D.2
  Top Layer w0.3: U1D.15@9.825,-22.525 10.449,-22.525 10.587,-22.388 10.587,-22.088 v1(10.625,-22.05) ; C12D.1 v1(14.2,-23.949) 14.2,-23.198 14.223,-23.175 U1D.1 ; C9D.1 v1(14.2,-15.949) 14.2,-15.198 14.223,-15.175 U2D.1 ; U5D.16 24.825,-26.148 24.848,-26.125 v1(25.599,-26.125) C17D.1 ; U5D.1 v1(25.64,-20.475) 26.35,-21.185 C13D.1 ; U4D.1 v1(25.64,-11.65) C11D.1@26.35,-12.36
  Top Layer w0.5: C8D.1 2.673,-2.527 3.613,-2.527 P2D.1
  Bottom Layer w1: v1(-2.175,-23.6) -2.175,-24.175 ; v1(-2.05,-25.35) -2.175,-25.225 -2.175,-24.175 ; v1(1.075,-24.15) -2.15,-24.15 -2.175,-24.175 ; v1(7.575,-19.9) 8.675,-19.9 10.9,-22.125 12.376,-22.125 v1(14.2,-23.949) ; v1(10.975,-11.775) v1(13.175,-11.775)
P3.3V_B: P20D.18 P22D.1 R20D.1 R21D.1 | length 20
  Top Layer w0.2: v1(51.4,-29.7) R20D.1 ; R21D.1 54.24,-32.4 55.24,-31.4 P20D.18
  Bottom Layer w0.2: P22D.1 47.15,-33.95 v1(51.4,-29.7) 51.4,-31.3 52.1,-32 53.6,-32 54,-31.6 v1(55,-31.6)
PACK_P: P20D.21 P20D.22 P20D.23 P21D.1 | length 24.2
  Top Layer w0.3: v1@56.3,-33.4 v1@56.424,-33.524 ; P20D.23 56.8,-33.9 v1@56.424,-33.524 ; P20D.22 56.549,-33.4 v1@56.424,-33.524 ; P20D.21 56.8,-32.9 56.424,-33.276 v1(56.424,-33.4) v1@56.424,-33.524
  Top Layer w1: v1(54.5,-33.4) v1(55.5,-33.4) v1@56.3,-33.4
  Bottom Layer w1: P21D.1 45.92,-39.48 52,-33.4 v1(55.5,-33.4) v1(56.424,-33.4)
PROG_3V: Q5D.1 Q6D.2 R6D.1 | length 52.5
  Top Layer w0.15: Q5D.1 5.725,-25.05 11.225,-30.55 v1(19.575,-30.55) ; R6D.1 28.4,-5.1 28.4,-6.2 Q6D.2 28.575,-6.375 28.75,-6.55 28.75,-7.032 29.125,-7.407 29.125,-12.975 v1(29.85,-13.7)
  Bottom Layer w0.15: v1(19.575,-30.55) 27.325,-30.55 29.85,-28.025 v1(29.85,-13.7)
PROG_B: P1D.6 Q5D.2 | length 7.6
  Top Layer w0.15: P1D.6 -0.1,-20.9 -0.225,-21.025 -0.225,-23.643 1.182,-25.05 Q5D.2
PROG_B_3V: P2D.18 Q6D.1 R7D.1 | length 12.7
  Top Layer w0.15: Q6D.1 28.4,-7.85 v1(28.4,-8.5) 28.4,-9.15 R7D.1
  Bottom Layer w0.15: P2D.18 26.4,0.06 26.4,-6.575 28.325,-8.5 v1(28.4,-8.5)
RPI_5V: C7D.1 P2D.2 P2D.4 Q3D.4 R3D.1 | length 34.2
  Top Layer w0.15: P2D.4 6.14,0 6.14,-2.64 7.8,-4.3 R3D.1
  Top Layer w0.3: Q3D.4 6,-15.6 C7D.1
  Top Layer w1: C7D.1 7.45,-15.85 v1(7.45,-17.25)
  Bottom Layer w0.5: P2D.2 4.875,1.275 6.14,1.275 ; 6.14,-3.725 6.14,1.275 ; P2D.4 7.405,1.275 6.14,1.275
  Bottom Layer w1: 6.14,-3.725 5.15,-4.715 5.15,-14.075 7.45,-16.375 v1(7.45,-17.25)
  other v1: 7.425,-16.5 7.125,-15.75
RPI_URXD: P2D.10 U4D.4 U5D.4 | length 35.8
  Top Layer w0.15: v1(22.325,-9.7) 22.875,-10.25 U4D.4 ; v1(22.4,-18.9) 22.875,-19.375 U5D.4
  Bottom Layer w0.15: P2D.10 16.125,0.175 23.625,0.175 24.1,-0.3 24.1,-3.525 25.2,-4.625 25.2,-8.375 23.875,-9.7 v1(22.325,-9.7) 21.125,-10.9 21.125,-16.125 22.4,-17.4 v1(22.4,-18.9)
RPI_UTXD: P2D.8 U4D.3 U5D.3 | length 41.4
  Top Layer w0.15: U5D.3 v1(23.525,-18.925) ; U4D.3 v1(23.525,-8.5)
  Bottom Layer w0.15: P2D.8 13.96,-0.2 23.125,-0.2 23.75,-0.825 23.75,-4.1 24.5,-4.85 24.5,-8.175 24.175,-8.5 v1(23.525,-8.5) 22.275,-8.5 20.375,-10.4 20.375,-18.05 22.05,-19.725 22.725,-19.725 v1(23.525,-18.925)
SPK+: P20D.3 P20D.4 P24D.1 | length 9
  Top Layer w0.2: P20D.4 57.45,-24.4 57.175,-24.125 57.225,-24.125 57.45,-23.9 P20D.3
  Top Layer w0.4: P24D.1 53.3,-20.25 57.175,-24.125
SPK-: P20D.1 P20D.2 P24D.2 | length 13.1
  Top Layer w0.2: P20D.2 57.45,-23.4 57.233,-23.183 57.233,-23.117 57.45,-22.9 P20D.1
  Top Layer w0.4: P24D.2 56,-15.62 56,-21.95 57.233,-23.183
UART_FPGA_SEL: P2D.12 Q7D.1 R9D.1 U5D.9 | length 36.6
  Top Layer w0.15: v1(16.8,-10.125) 16,-9.325 16,-6.7 18.875,-3.825 18.875,-0.035 P2D.12 ; Q7D.1 18.2,-27.75 18.2,-28.525 18.7,-29.025 R9D.1 19.475,-28.25 20.275,-27.45 U5D.9 20.275,-24.625 18.6,-22.95 v1(18.6,-22.2)
  Bottom Layer w0.15: v1(16.8,-10.125) 18.6,-11.925 v1(18.6,-22.2)
UP5K_CSN: P1D.22 U2D.11 | length 9.2
  Top Layer w0.15: P1D.22 1.525,-12.9 2.5,-11.925 U2D.11
UP5K_CSN_3V: P2D.24 U2D.6 | length 24.1
  Top Layer w0.15: U2D.6 16.85,-11.925 26.215,-2.56 26.215,-1.335 27.624,0.074 30.523,0.074 31.72,1.27 P2D.24
UP5K_MISO: P1D.20 U2D.13 | length 9.2
  Top Layer w0.15: P1D.20 1.8,-13.9 2.675,-13.025 5.577,-13.025 5.777,-13.225 U2D.13
UP5K_MISO_3V: P2D.21 U2D.4 | length 20.4
  Top Layer w0.15: U2D.4 16.426,-13.225 26.001,-3.65 26.8,-3.65 29.18,-1.27 P2D.21
UP5K_MON0: P1D.8 R10D.2 R13D.1 U5D.14 | length 38.9
  Top Layer w0.15: P1D.8 -0.256,-19.9 -0.825,-20.469 -0.825,-23.892 5.783,-30.5 6.675,-30.5 6.713,-30.538 7.763,-30.538 9,-31.775 20.3,-31.775 23.525,-28.55 23.525,-28 U5D.14 ; R13D.1 v1@5.5,-32
  Bottom Layer w0.15: v1(5.475,-31.975) 5.811,-31.639 5.811,-31.414 v1(6.713,-30.513)
UP5K_MON1: P1D.7 R11D.2 R14D.1 U5D.13 | length 43.7
  Top Layer w0.15: P1D.7 -0.25,-20.4 -0.525,-20.675 -0.525,-23.767 5.558,-29.85 v1(7.375,-29.85) 9.8,-29.85 11.15,-31.2 19.825,-31.2 22.875,-28.15 U5D.13 22.875,-24.875 24,-23.75 R11D.2 ; R14D.1 v1@5.5,-33
  Bottom Layer w0.15: v1(5.475,-32.975) 7.375,-31.075 v1(7.375,-29.85)
UP5K_MOSI: P1D.21 U2D.12 | length 9.1
  Top Layer w0.15: P1D.21 1.725,-13.4 2.55,-12.575 U2D.12
UP5K_MOSI_3V: P2D.19 U2D.5 | length 17.9
  Top Layer w0.15: U2D.5 16.651,-12.575 25.876,-3.35 26.225,-3.35 27.73,-1.845 P2D.19
UP5K_RGB0: P20D.7 P22D.8 | length 18
  Top Layer w0.15: P22D.8 46.87,-16.17 56.6,-25.9 P20D.7
UP5K_RGB1: P20D.6 P22D.9 | length 18.8
  Top Layer w0.15: P22D.9 44.754,-13.63 56.524,-25.4 P20D.6
UP5K_RGB2: P20D.5 P22D.10 | length 20.3
  Top Layer w0.15: P22D.10 43.75,-12.201 56.449,-24.9 P20D.5
UP5K_SCK: P1D.19 U2D.14 | length 9.3
  Top Layer w0.15: P1D.19 1.9,-14.4 2.825,-13.475 4.95,-13.475 5.175,-13.7 7.675,-13.7 7.85,-13.875 U2D.14
UP5K_SCK_3V: P2D.23 U2D.3 | length 23.2
  Top Layer w0.15: U2D.3 16.2,-13.875 26.125,-3.95 29.04,-3.95 31.72,-1.27 P2D.23
USBD_N: P23D.2 R23D.2 | length 10.4
  Top Layer w0.3: R23D.2 52.265,-34.965 52.265,-35.665 52.5,-35.9 52.5,-40.5 54.45,-42.45 P23D.2
USBD_P: P23D.3 R24D.2 | length 9.5
  Top Layer w0.3: R24D.2 53.2,-35.7 53,-35.9 53,-40.3 54.5,-41.8 P23D.3
VBUS: C5D.1 P1D.13 P1D.14 P1D.15 Q3D.2 Q3D.3 | length 13.5
  Top Layer w0.3: P1D.13 1.399,-17.4 1.674,-17.125 3.575,-17.125 C5D.1 ; P1D.14 C5D.1@3.6,-16.9 ; P1D.15 3.1,-16.4 C5D.1@3.6,-16.9 ; Q3D.2 5.198,-17.198 3.898,-17.198 C5D.1 ; Q3D.3 4.3,-16.4 C5D.1 ; C5D.1@3.6,-16.9 C5D.1
VBUS_EN: P2D.40 Q4D.1 R5D.2 | length 58.2
  Top Layer w0.15: R5D.2 4.875,-7.525 4.875,-6.525 Q4D.1 7.875,-6.35 8.575,-5.65 8.575,1.9 9.225,2.55 51.85,2.55 P2D.40
VSYS_T: P20D.8 P22D.11 | length 24.6
  Top Layer w0.3: v1(55.7,-26) 56.1,-26.4 P20D.8
  Bottom Layer w0.3: P22D.11 49,-13.8 49,-19.3 v1(55.7,-26)
pads on no net: P1D.0 P1D.12 P1D.17 P2D.3 P2D.5 P2D.26 P2D.27 P2D.28 P2D.29 P2D.31 P2D.32 P2D.33 P2D.35 P2D.36 P2D.37 P2D.38 P3D.1 P20D.0 P23D.1 U4D.11 U4D.12 U5D.11 U5D.12

## Polygon pours and split planes (outlines as drawn)
GND on Bottom Layer "GND_L02_P002" (solid, remove dead copper, pour order 2): -4.6,4.7 -4.6,-49.95 -1.625,-52.925 60.125,-52.925 62.575,-50.475 62.575,2.4 59.825,5.15 -3.95,5.15 -4.7,4.4
P3.3V on Top Layer "P3.3V_L01_P004" (solid, remove dead copper, pour order 4): 3.275,3 3.275,-0.925 0.575,-3.625 -2.975,-3.625 -3,-3.6 -3,-31.625 1.475,-36.1 24.8,-36.1 36.775,-24.125 36.775,2.975

## Keep-outs
Keep-Out Layer:
  the board outline again, w0.2

## Other copper
Top Layer:
  region net GND: 37.5,-51.75 37.5,-47.75 32.25,-47.75 32.25,-51.75
  region net GND: 60.75,-3.5 56.75,-3.5 56.75,-8.75 60.75,-8.75
  rectangle net GND: -2.75,-43.25 1.25,-38

## Silkscreen, mask and mechanical layers (free items; w line width, h text height)
Top silk (Pantone 431C):
  lines w0.2: 7.5,-43.5 7.5,-35.25 27,-35.25 27,-43.5 7.5,-43.5
  text "+ SPK -" at 46.8,-18.1 h1.8 r90
  text "+ BAT -" at 45.7,-37.5 h1.8
  text "CERN OHL 1.2" at 30,-44 h1.8
  text "Betrusted Debug Hat" at 6.943,-47.33 h2.5
  text "v1" at 6.943,-49.23 h1.8
  text "07/19" at 14.5,-49.25 h1.8
  text "bunnie" at 22.75,-49.25 h1.8
  text "https://github.com/betrusted-io" at 7.9,-51 h1.5
Top Solder (Pantone 636U):
  region: 37.5,-51.75 37.5,-47.75 32.25,-47.75 32.25,-51.75
  region: 60.75,-3.5 56.75,-3.5 56.75,-8.75 60.75,-8.75
  rectangle: -2.75,-43.25 1.25,-38
Bottom Solder (Pantone 636U):
  rectangle: 29.75,-51.75 39.75,-47.75
  rectangle: 56.75,-10 60.75,-2.75
  rectangle: -2.75,-44.75 1.25,-30.25
Mechanical 1:
  the board outline again, w0.2
Bottom Assembly:
  drawing of 191 lines, arcs and shapes, not listed
  text "Layer" at 68.497,-2.096 h1
  text "Name" at 75.504,-2.096 h1
  text "Material" at 104.503,-2.096 h1
  text "Thickness" at 119.008,-2.096 h1
  text "Constant" at 130.013,-2.096 h1
  text "Board Layer Stack" at 139.685,-2.096 h1
  text "Top silk (Pantone 431C)" at 75.504,-4.096 h1
  text "Top Solder (Pantone 636U)" at 75.504,-6.096 h1
  text "Solder Resist" at 104.503,-6.096 h1
  text "0.010mm" at 119.008,-6.096 h1
  text "3.5" at 130.013,-6.096 h1
  text "1" at 68.497,-8.096 h1
  text "Top Layer" at 75.504,-8.096 h1
  text "Copper" at 104.503,-8.096 h1
  text "0.036mm" at 119.008,-8.096 h1
  text "Dielectric 2" at 75.504,-10.096 h1
  text "FR-4" at 104.503,-10.096 h1
  text "1.500mm" at 119.008,-10.096 h1
  text "4.2" at 130.013,-10.096 h1
  text "2" at 68.497,-12.096 h1
  text "Bottom Layer" at 75.504,-12.096 h1
  text "Copper" at 104.503,-12.096 h1
  text "0.036mm" at 119.008,-12.096 h1
  text "Bottom Solder (Pantone 636U)" at 75.504,-14.096 h1
  text "Solder Resist" at 104.503,-14.096 h1
  text "0.010mm" at 119.008,-14.096 h1
  text "3.5" at 130.013,-14.096 h1
  text "Bottom silk (Pantone 431C)" at 75.504,-16.096 h1
  text "Total board thickness:" at 68.497,-18.096 h1
  text "1.591mm" at 119.008,-18.096 h1
  text "Finish - HASL" at 68.5,-20.75 h1

## Text inside footprints (layer, text, board x,y; h text height)
P2D: Bottom silk (Pantone 431C) "1" at 2.47,-0.63 h1.27 r180